# Altium PCB AX301_AX4010.PcbDoc (part 9 of 10)
Units mm, origin at the board's own origin, x right, y up, seen from the top; angles counter-clockwise.
Board outline 131.7 x 91.8 mm, 4 copper layers (Top Layer, GND, Mid-Layer 1, Bottom Layer); 191 components, 338 nets, 1108 pads, 420 vias.
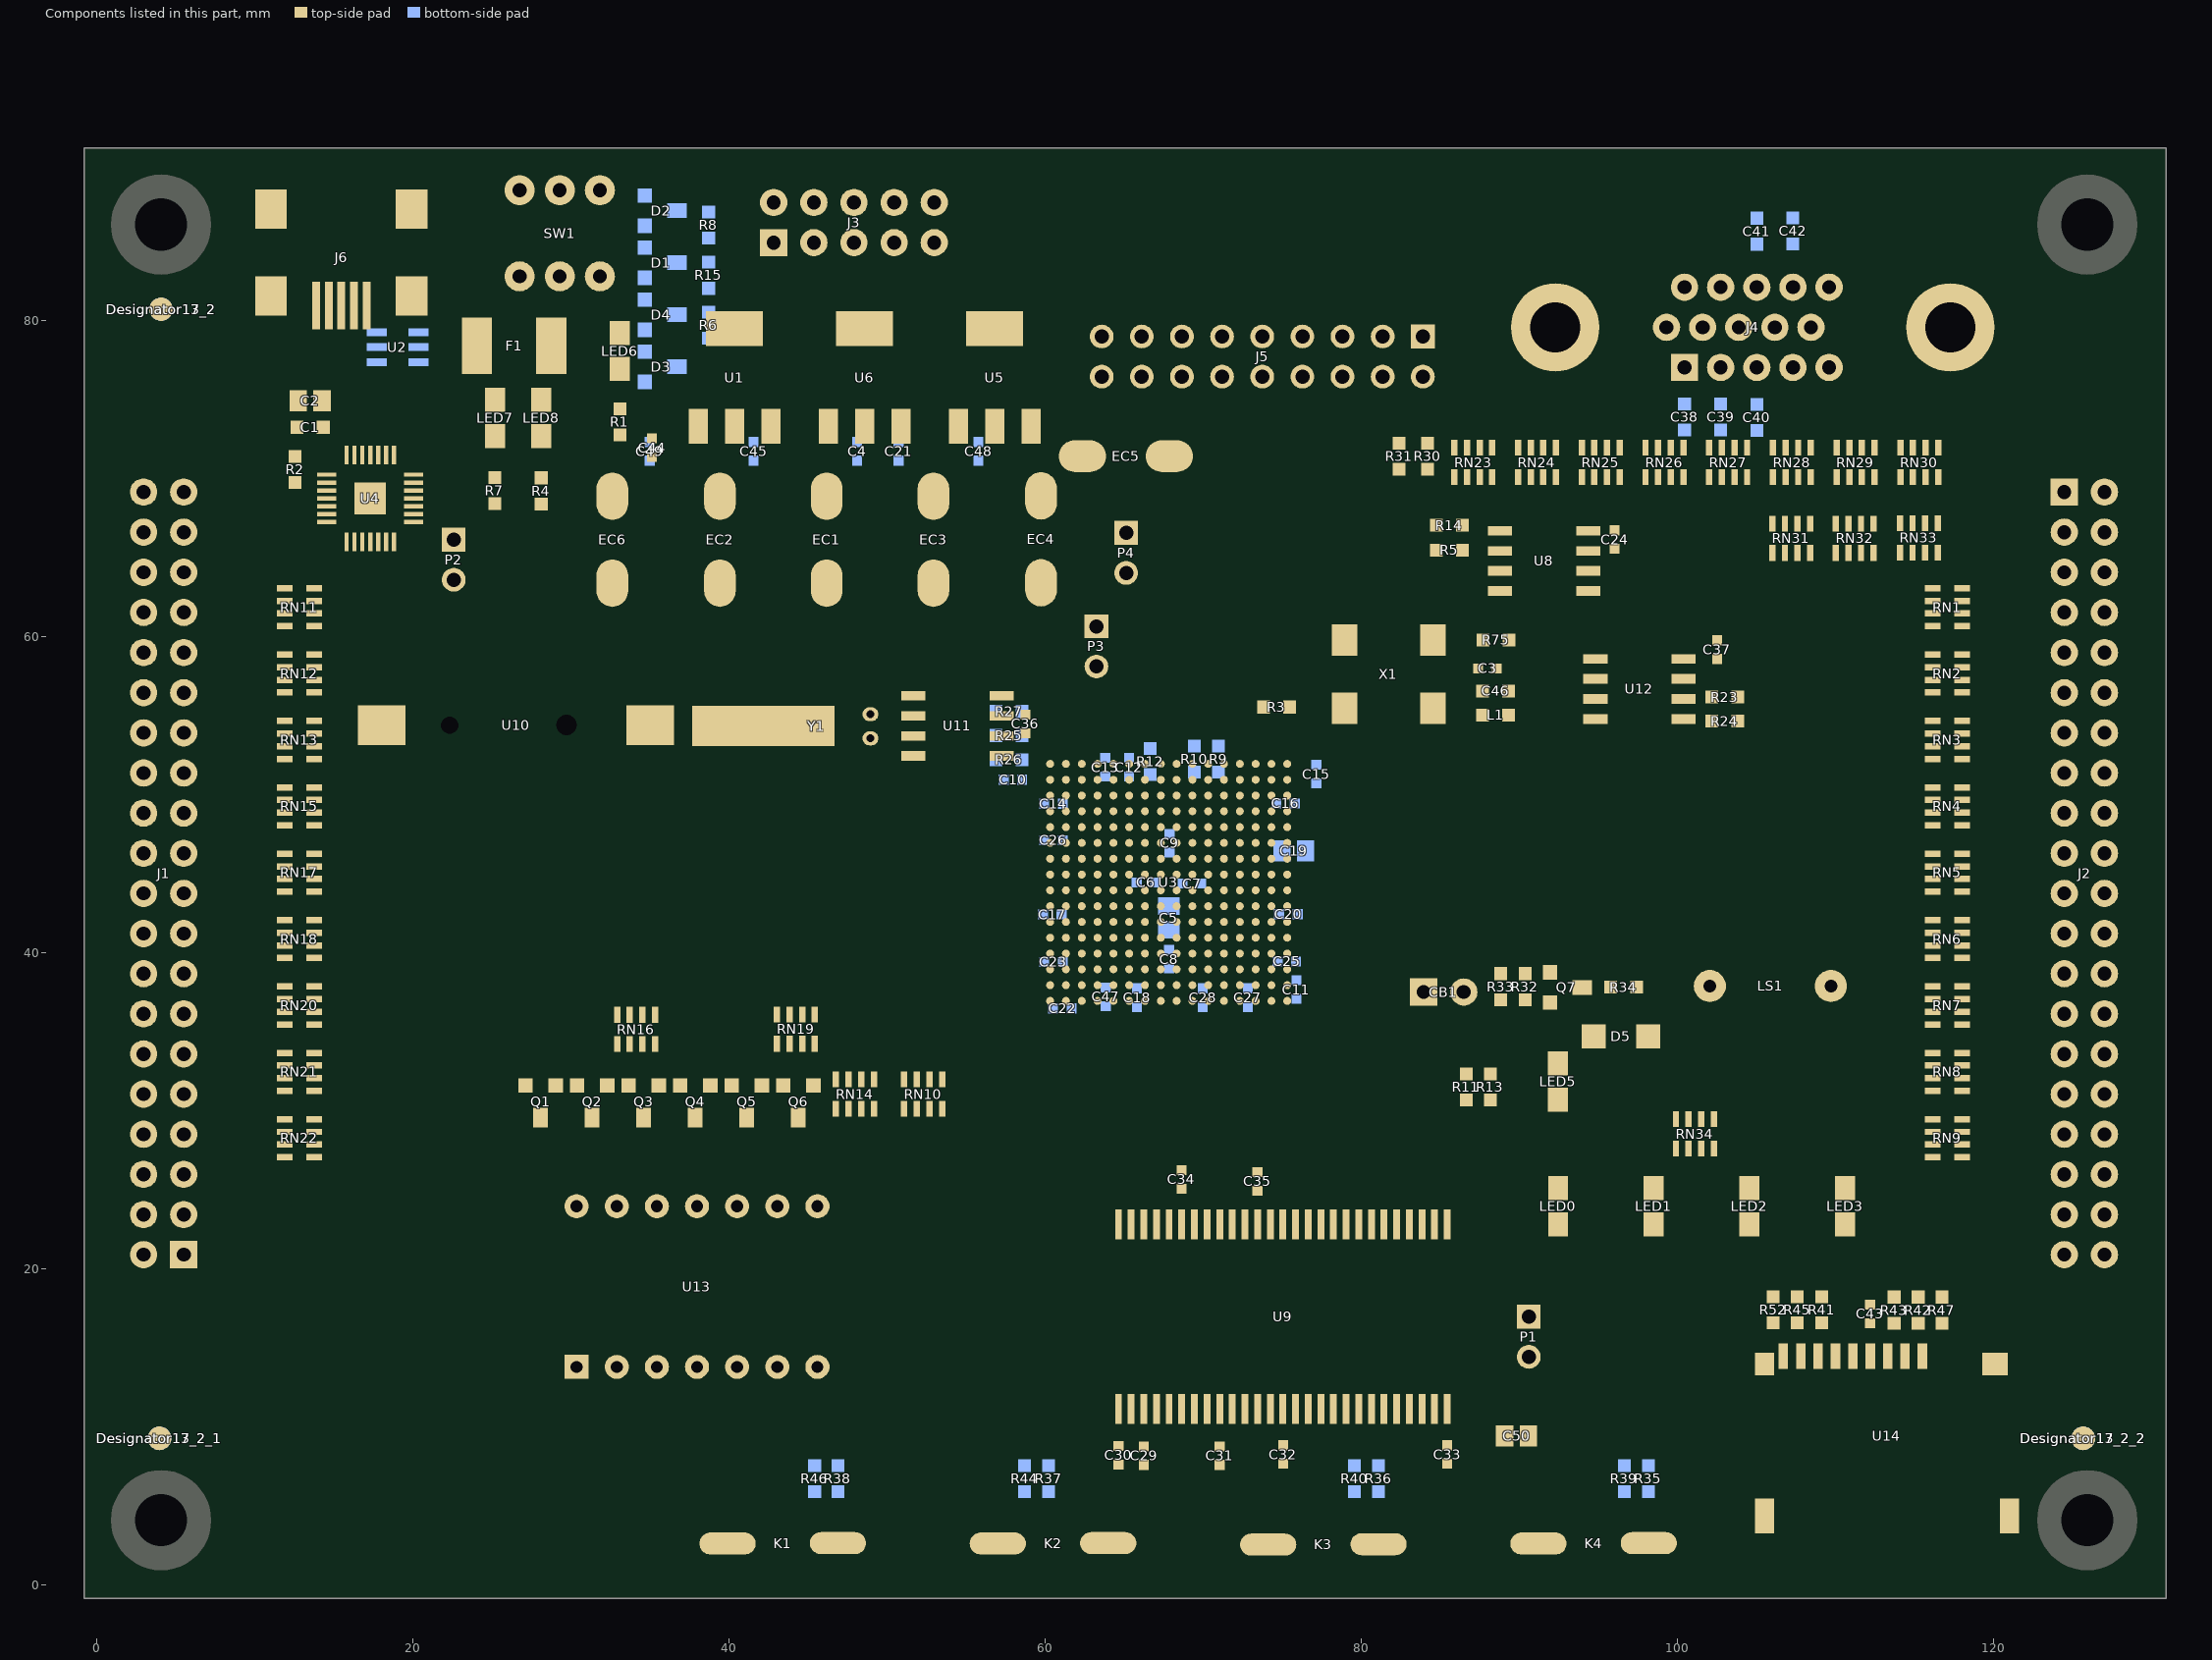
[diagram p11: the components of this part, seen from the top]

## Via types
v1: diameter 0.508, hole 0.254, Top Layer to Bottom Layer, 377 vias
v2: diameter 0.762, hole 0.381, Top Layer to Bottom Layer, 41 vias
v3: diameter 1.016, hole 0.508, Top Layer to Bottom Layer, 2 vias

## Nets (pads, with @x,y where several pads share a name; then routed paths per layer and width w, separated by ;. In a path a pad name is that pad's centre, name@x,y a point inside that pad or via, vN(x,y) a via of type N, cw(c..) or ccw(c..) an arc to the next point about the centre after c; other vN are vias at no path point) (continued)
copper on no net: (continued)
  Top Layer w0.017: 8.423,0.436 33.854,0.436 ; 8.423,0.452 33.854,0.452 ; 8.423,0.469 33.854,0.469 ; 8.423,0.485 33.854,0.485 ; 8.423,0.502 33.854,0.502 ; 8.423,0.518 33.854,0.518 ; 8.423,0.535 33.854,0.535 ; 8.423,0.551 33.854,0.551 ; 8.423,0.568 33.854,0.568 ; 8.423,0.584 33.854,0.584 ; 8.423,0.601 33.854,0.601 ; 8.423,0.617 33.854,0.617 ; 8.423,0.634 33.854,0.634 ; 8.423,0.65 33.854,0.65 ; 8.423,0.667 33.854,0.667 ; 8.423,0.683 33.854,0.683 ; 8.423,0.7 33.854,0.7 ; 8.423,0.716 33.854,0.716 ; 8.423,0.733 33.854,0.733 ; 8.423,0.749 33.854,0.749 ; 8.423,0.766 33.854,0.766 ; 8.423,0.782 33.854,0.782 ; 8.423,0.799 33.854,0.799 ; 8.423,0.815 33.854,0.815 ; 8.423,0.832 33.854,0.832 ; 8.423,0.848 33.854,0.848 ; 8.423,0.865 33.854,0.865 ; 8.423,0.881 33.854,0.881 ; 8.423,0.898 33.854,0.898 ; 8.423,0.914 33.854,0.914 ; 8.423,0.931 33.854,0.931 ; 8.423,0.947 33.854,0.947 ; 8.423,0.964 33.854,0.964 ; 8.423,0.98 33.854,0.98 ; 8.423,0.997 33.854,0.997 ; 8.423,1.013 33.854,1.013 ; 8.423,1.03 33.854,1.03 ; 8.423,1.046 33.854,1.046 ; 8.423,1.063 33.854,1.063 ; 8.423,1.079 33.854,1.079 ; 8.423,1.096 33.854,1.096 ; 8.423,1.113 33.854,1.113 ; 8.423,1.129 33.854,1.129 ; 8.423,1.146 33.854,1.146 ; 8.423,1.162 33.854,1.162 ; 8.423,1.179 33.854,1.179 ; 8.423,1.195 33.854,1.195 ; 8.423,1.212 33.854,1.212 ; 8.423,1.228 33.854,1.228 ; 8.423,1.245 33.854,1.245 ; 8.423,1.261 33.854,1.261 ; 8.423,1.278 33.854,1.278 ; 8.423,1.294 9.188,1.294 ; 8.423,1.311 9.188,1.311 ; 8.423,1.327 9.204,1.327 ; 8.423,1.344 9.204,1.344 ; 8.423,1.36 9.221,1.36 ; 8.423,1.377 9.221,1.377 ; 8.423,1.393 9.237,1.393 ; 8.423,1.41 9.237,1.41 ; 8.423,1.426 9.254,1.426 ; 8.423,1.443 9.254,1.443 ; 8.423,1.459 9.27,1.459 ; 8.423,1.476 9.27,1.476 ; 8.423,1.492 9.287,1.492 ; 8.423,1.509 9.303,1.509 ; 8.423,1.525 9.303,1.525 ; 8.423,1.542 9.32,1.542 ; 8.423,1.558 9.32,1.558 ; 8.423,1.575 9.336,1.575 ; 8.423,1.591 9.353,1.591 ; 8.423,1.608 9.353,1.608 ; 8.423,1.624 9.369,1.624 ; 8.423,1.641 9.369,1.641 ; 8.423,1.657 9.386,1.657 ; 8.423,1.674 9.402,1.674 ; 8.423,1.69 9.402,1.69 ; 8.423,1.707 9.419,1.707 ; 8.423,1.723 9.435,1.723 ; 8.423,1.74 9.435,1.74 ; 8.423,1.756 9.452,1.756 ; 8.423,1.773 9.468,1.773 ; 8.423,1.789 9.468,1.789 ; 8.423,1.806 9.485,1.806 ; 8.423,1.822 9.501,1.822 ; 8.423,1.839 9.518,1.839 ; 8.423,1.855 9.518,1.855 ; 8.423,1.872 9.534,1.872 ; 8.423,1.888 9.551,1.888 ; 8.423,1.905 9.567,1.905 ; 8.423,1.922 9.567,1.922 ; 8.423,1.938 9.584,1.938 ; 8.423,1.955 9.6,1.955 ; 8.423,1.971 9.617,1.971 ; 8.423,1.988 9.633,1.988 ; 8.423,2.004 9.633,2.004 ; 8.423,2.021 9.65,2.021 ; 8.423,2.037 9.666,2.037 ; 8.423,2.054 9.683,2.054 ; 8.423,2.07 9.699,2.07 ; 8.423,2.087 9.716,2.087 ; 8.423,2.103 9.732,2.103 ; 8.423,2.12 9.732,2.12 ; 8.423,2.136 9.749,2.136 ; 8.423,2.153 9.765,2.153 ; 8.423,2.169 9.782,2.169 ; 8.423,2.186 9.798,2.186 ; 8.423,2.202 9.815,2.202 ; 8.423,2.219 9.831,2.219 ; 8.423,2.235 9.848,2.235 ; 8.423,2.252 9.865,2.252 ; 8.423,2.268 9.881,2.268 ; 8.423,2.285 9.898,2.285 ; 8.423,2.301 9.914,2.301 ; 8.423,2.318 9.931,2.318 ; 8.423,2.334 9.947,2.334 ; 8.423,2.351 9.964,2.351 ; 8.423,2.367 9.98,2.367 ; 8.423,2.384 9.997,2.384 ; 8.423,2.4 10.013,2.4 ; 8.423,2.417 10.046,2.417 ; 8.423,2.433 10.063,2.433 ; 8.423,2.45 10.079,2.45 ; 8.423,2.466 10.096,2.466 ; 8.423,2.483 10.112,2.483 ; 8.423,2.499 10.145,2.499 ; 8.423,2.516 10.162,2.516 ; 8.423,2.532 10.178,2.532 ; 8.423,2.549 10.195,2.549 ; 8.423,2.565 10.211,2.565 ; 8.423,2.582 10.244,2.582 ; 8.423,2.598 10.261,2.598 ; 8.423,2.615 10.294,2.615 ; 8.423,2.631 10.31,2.631 ; 8.423,2.648 9.964,2.648 ; 8.423,2.664 9.98,2.664 ; 8.423,2.681 9.98,2.681 ; 8.423,2.697 9.997,2.697 ; 8.423,2.714 10.013,2.714 ; 8.423,2.73 10.013,2.73 ; 8.423,2.747 10.03,2.747 ; 8.423,2.764 10.03,2.764 ; 8.423,2.78 10.046,2.78 ; 8.423,2.797 10.046,2.797 ; 8.423,2.813 10.063,2.813 ; 8.423,2.83 10.063,2.83 ; 8.423,2.846 10.079,2.846 ; 8.423,2.863 10.096,2.863 ; 8.423,2.879 10.096,2.879 ; 8.423,2.896 10.112,2.896 ; 8.423,2.912 10.112,2.912 ; 8.423,2.929 10.129,2.929 ; 8.423,2.945 10.129,2.945 ; 8.423,2.962 10.145,2.962 ; 8.423,2.978 10.162,2.978 ; 8.423,2.995 10.162,2.995 ; 8.423,3.011 10.178,3.011 ; 8.423,3.028 10.178,3.028 ; 8.423,3.044 10.195,3.044 ; 8.423,3.061 10.195,3.061 ; 8.423,3.077 10.211,3.077 ; 8.423,3.094 10.228,3.094 ; 8.423,3.11 10.228,3.11 ; 8.423,3.127 10.244,3.127 ; 8.423,3.143 10.244,3.143 ; 8.423,3.16 10.261,3.16 ; 8.423,3.176 10.261,3.176 ; 8.423,3.193 10.277,3.193 ; 8.423,3.209 10.277,3.209 ; 8.423,3.226 10.294,3.226 ; 8.423,3.242 10.31,3.242 ; 8.423,3.259 10.31,3.259 ; 8.423,3.275 10.327,3.275 ; 8.423,3.292 10.327,3.292 ; 8.423,3.308 10.343,3.308 ; 8.423,3.325 10.343,3.325 ; 8.423,3.341 10.36,3.341 ; 8.423,3.358 10.376,3.358 ; 8.423,3.374 10.376,3.374 ; 8.423,3.391 10.393,3.391 ; 8.423,3.407 10.393,3.407 ; 8.423,3.424 10.409,3.424 ; 8.423,3.44 10.409,3.44 ; 8.423,3.457 10.426,3.457 ; 8.423,3.473 10.442,3.473 ; 8.423,3.49 10.442,3.49 ; 8.423,3.506 10.459,3.506 ; 8.423,3.523 10.459,3.523 ; 8.423,3.539 10.475,3.539 ; 8.423,3.556 10.475,3.556 ; 8.423,3.573 10.492,3.573 ; 8.423,3.589 10.508,3.589 ; 8.423,3.606 10.508,3.606 ; 8.423,3.622 10.525,3.622 ; 8.423,3.639 10.525,3.639 ; 8.423,3.655 10.541,3.655 ; 8.423,3.672 10.541,3.672 ; 8.423,3.688 10.558,3.688 ; 8.423,3.705 10.558,3.705 ; 8.423,3.721 10.574,3.721 ; 8.423,3.738 10.591,3.738 ; 8.423,3.754 10.591,3.754 ; 8.423,3.771 10.607,3.771 ; 8.423,3.787 10.607,3.787 ; 8.423,3.804 10.624,3.804 ; 8.423,3.82 10.624,3.82 ; 8.423,3.837 10.64,3.837 ; 8.423,3.853 10.657,3.853 ; 8.423,3.87 10.657,3.87 ; 8.423,3.886 10.674,3.886 ; 8.423,3.903 10.674,3.903 ; 8.423,3.919 10.69,3.919 ; 8.423,3.936 10.69,3.936 ; 8.423,3.952 10.707,3.952 ; 8.423,3.969 10.723,3.969 ; 8.423,3.985 10.723,3.985 ; 8.423,4.002 10.74,4.002 ; 8.423,4.018 10.74,4.018 ; 8.423,4.035 10.756,4.035 ; 8.423,4.051 10.756,4.051 ; 8.423,4.068 10.773,4.068 ; 8.423,4.084 10.773,4.084 ; 8.423,4.101 10.789,4.101 ; 8.423,4.117 10.806,4.117 ; 8.423,4.134 10.806,4.134 ; 8.423,4.15 10.822,4.15 ; 8.423,4.167 10.822,4.167 ; 8.423,4.183 10.839,4.183 ; 8.423,4.2 10.839,4.2 ; 8.423,4.216 10.855,4.216 ; 8.423,4.233 10.872,4.233 ; 8.423,4.249 10.872,4.249 ; 8.423,4.266 10.888,4.266 ; 8.423,4.282 10.888,4.282 ; 8.423,4.299 10.905,4.299 ; 8.423,4.315 10.905,4.315 ; 8.423,4.332 10.921,4.332 ; 8.423,4.348 10.938,4.348 ; 8.423,4.365 10.938,4.365 ; 8.423,4.381 10.954,4.381 ; 8.423,4.398 10.954,4.398 ; 8.423,4.415 10.971,4.415 ; 8.423,4.431 10.971,4.431 ; 8.423,4.448 10.987,4.448 ; 8.423,4.464 10.987,4.464 ; 8.423,4.481 11.004,4.481 ; 8.423,4.497 11.02,4.497 ; 8.423,4.514 11.02,4.514 ; 8.423,4.53 11.037,4.53 ; 8.423,4.547 11.037,4.547 ; 8.423,4.563 11.053,4.563 ; 8.423,4.58 11.053,4.58 ; 8.423,4.596 11.07,4.596 ; 8.423,4.613 11.086,4.613 ; 8.423,4.629 11.086,4.629 ; 8.423,4.646 11.103,4.646 ; 8.423,4.662 11.103,4.662 ; 8.423,4.679 11.119,4.679 ; 8.423,4.695 11.119,4.695 ; 8.423,4.712 11.136,4.712 ; 8.423,4.728 11.152,4.728 ; 8.423,4.745 11.152,4.745 ; 8.423,4.761 11.169,4.761 ; 8.423,4.778 11.169,4.778 ; 8.423,4.794 11.185,4.794 ; 8.423,4.811 11.185,4.811 ; 8.423,4.827 11.202,4.827 ; 8.423,4.844 11.218,4.844 ; 8.423,4.86 11.218,4.86 ; 8.423,4.877 11.235,4.877 ; 8.423,4.893 11.235,4.893 ; 8.423,4.91 11.251,4.91 ; 8.423,4.926 11.251,4.926 ; 8.423,4.943 11.268,4.943 ; 8.423,4.959 11.268,4.959 ; 8.423,4.976 11.284,4.976 ; 8.423,4.992 11.301,4.992 ; 8.423,5.009 11.301,5.009 ; 8.423,5.025 11.317,5.025 ; 8.423,5.042 11.317,5.042 ; 8.423,5.058 11.334,5.058 ; 8.423,5.075 11.334,5.075 ; 8.423,5.091 11.35,5.091 ; 8.423,5.108 11.367,5.108 ; 8.423,5.124 11.367,5.124 ; 8.423,5.141 11.383,5.141 ; 8.423,5.157 11.383,5.157 ; 8.423,5.174 11.4,5.174 ; 8.423,5.19 11.4,5.19 ; 8.423,5.207 11.416,5.207 ; 8.423,5.224 11.433,5.224 ; 8.423,5.24 11.433,5.24 ; 8.423,5.257 11.449,5.257 ; 8.423,5.273 11.449,5.273 ; 8.423,5.29 11.466,5.29 ; 8.423,5.306 11.466,5.306 ; 8.423,5.323 11.482,5.323 ; 8.423,5.339 11.482,5.339 ; 8.423,5.356 11.499,5.356 ; 8.423,5.372 11.516,5.372 ; 8.423,5.389 11.516,5.389 ; 8.423,5.405 11.532,5.405 ; 8.423,5.422 11.532,5.422 ; 8.423,5.438 11.549,5.438 ; 8.423,5.455 11.549,5.455 ; 8.423,5.471 11.565,5.471 ; 8.423,5.488 11.582,5.488 ; 8.423,5.504 11.582,5.504 ; 8.423,5.521 11.598,5.521 ; 8.423,5.537 11.598,5.537 ; 8.423,5.554 11.615,5.554 ; 8.423,5.57 11.615,5.57 ; 8.423,5.587 11.631,5.587 ; 8.423,5.603 11.648,5.603 ; 8.423,5.62 11.648,5.62 ; 8.423,5.636 11.664,5.636 ; 8.423,5.653 11.664,5.653 ; 8.423,5.669 11.681,5.669 ; 8.423,5.686 33.854,5.686 ; 8.423,5.702 33.854,5.702 ; 8.423,5.719 33.854,5.719 ; 8.423,5.735 33.854,5.735 ; 8.423,5.752 33.854,5.752 ; 8.423,5.768 33.854,5.768 ; 8.423,5.785 33.854,5.785 ; 8.423,5.801 33.854,5.801 ; 8.423,5.818 33.854,5.818 ; 8.423,5.834 33.854,5.834 ; 8.423,5.851 33.854,5.851 ; 8.423,5.867 33.854,5.867 ; 8.423,5.884 33.854,5.884 ; 8.423,5.9 33.854,5.9 ; 8.423,5.917 33.854,5.917 ; 8.423,5.933 33.854,5.933 ; 8.423,5.95 33.854,5.95 ; 8.423,5.966 33.854,5.966 ; 8.423,5.983 33.854,5.983 ; 8.423,5.999 33.854,5.999 ; 8.423,6.016 33.854,6.016 ; 8.423,6.032 33.854,6.032 ; 8.423,6.049 33.854,6.049 ; 8.423,6.066 33.854,6.066 ; 8.423,6.082 33.854,6.082 ; 8.423,6.099 33.854,6.099 ; 8.423,6.115 33.854,6.115 ; 8.423,6.132 33.854,6.132 ; 8.423,6.148 33.854,6.148 ; 8.423,6.165 33.854,6.165 ; 8.423,6.181 33.854,6.181 ; 8.423,6.198 33.854,6.198 ; 8.423,6.214 33.854,6.214 ; 8.423,6.231 33.854,6.231 ; 8.423,6.247 33.854,6.247 ; 8.423,6.264 33.854,6.264 ; 8.423,6.28 33.854,6.28 ; 8.423,6.297 33.854,6.297 ; 9.991,2.648 10.327,2.648 ; 10.024,2.664 10.36,2.664 ; 10.041,2.681 10.376,2.681 ; 10.057,2.697 10.393,2.697 ; 10.074,2.714 10.426,2.714 ; 10.09,2.73 10.459,2.73 ; 10.107,2.747 10.475,2.747 ; 10.14,2.764 10.508,2.764 ; 10.156,2.78 10.525,2.78 ; 10.173,2.797 10.558,2.797 ; 10.189,2.813 10.574,2.813 ; 10.206,2.83 10.607,2.83 ; 10.239,2.846 10.64,2.846 ; 10.255,2.863 10.674,2.863 ; 10.272,2.879 10.69,2.879 ; 10.305,2.896 10.723,2.896 ; 10.321,2.912 10.756,2.912 ; 10.338,2.929 10.789,2.929 ; 10.371,2.945 10.822,2.945 ; 10.387,2.962 10.855,2.962 ; 10.42,2.978 10.888,2.978 ; 10.437,2.995 10.921,2.995 ; 10.47,3.011 10.954,3.011 ; 10.486,3.028 10.987,3.028 ; 10.519,3.044 11.037,3.044 ; 10.552,3.061 11.07,3.061 ; 10.569,3.077 11.119,3.077 ; 10.602,3.094 11.152,3.094 ; 10.635,3.11 11.202,3.11 ; 10.651,3.127 11.251,3.127 ; 10.685,3.143 11.301,3.143 ; 10.701,1.294 12.49,1.294 ; 10.718,1.311 12.49,1.311 ; 10.718,1.327 12.49,1.327 ; 10.718,3.16 11.35,3.16 ; 10.734,1.344 12.49,1.344 ; 10.751,1.36 12.49,1.36 ; 10.751,1.377 12.49,1.377 ; 10.751,3.176 11.4,3.176 ; 10.767,1.393 12.49,1.393 ; 10.784,1.41 12.49,1.41 ; 10.784,1.426 12.49,1.426 ; 10.784,3.193 11.449,3.193 ; 10.8,1.443 12.49,1.443 ; 10.817,1.459 12.49,1.459 ; 10.817,1.476 12.473,1.476 ; 10.817,3.209 11.516,3.209 ; 10.833,1.492 12.473,1.492 ; 10.85,1.509 12.473,1.509 ; 10.85,1.525 12.473,1.525 ; 10.85,3.226 11.582,3.226 ; 10.866,1.542 12.473,1.542 ; 10.883,1.558 12.473,1.558 ; 10.883,3.242 11.648,3.242 ; 10.899,1.575 12.473,1.575 ; 10.899,1.591 12.473,1.591 ; 10.916,1.608 12.473,1.608 ; 10.916,3.259 11.73,3.259 ; 10.932,1.624 12.473,1.624 ; 10.949,1.641 12.473,1.641 ; 10.949,3.275 11.813,3.275 ; 10.965,1.657 12.457,1.657 ; 10.965,1.674 12.457,1.674 ; 10.982,1.69 12.457,1.69 ; 10.982,3.292 11.912,3.292 ; 10.998,1.707 12.457,1.707 ; 11.015,1.723 12.457,1.723 ; 11.015,3.308 12.044,3.308 ; 11.031,1.74 12.457,1.74 ; 11.048,1.756 12.457,1.756 ; 11.064,1.773 12.457,1.773 ; 11.064,3.325 12.325,3.325 ; 11.081,1.789 12.457,1.789 ; 11.097,1.806 12.457,1.806 ; 11.114,1.822 12.457,1.822 ; 11.114,3.341 12.325,3.341 ; 11.13,1.839 12.457,1.839 ; 11.147,1.855 12.44,1.855 ; 11.147,3.358 12.325,3.358 ; 11.163,1.872 12.44,1.872 ; 11.18,1.888 12.44,1.888 ; 11.196,1.905 12.44,1.905 ; 11.196,3.374 12.308,3.374 ; 11.213,1.922 12.44,1.922 ; 11.229,1.938 12.44,1.938 ; 11.246,1.955 12.44,1.955 ; 11.246,3.391 12.308,3.391 ; 11.262,1.971 12.44,1.971 ; 11.295,1.988 12.44,1.988 ; 11.295,3.407 12.308,3.407 ; 11.312,2.004 12.44,2.004 ; 11.328,2.021 12.44,2.021 ; 11.345,2.037 12.424,2.037 ; 11.345,3.424 12.308,3.424 ; 11.361,2.054 12.424,2.054 ; 11.394,2.07 12.424,2.07 ; 11.394,3.44 12.308,3.44 ; 11.411,2.087 12.424,2.087 ; 11.444,2.103 12.424,2.103 ; 11.46,2.12 12.424,2.12 ; 11.46,3.457 12.308,3.457 ; 11.477,2.136 12.424,2.136 ; 11.51,2.153 12.424,2.153 ; 11.51,3.473 12.308,3.473 ; 11.527,2.169 12.424,2.169 ; 11.56,2.186 12.424,2.186 ; 11.576,2.202 12.424,2.202 ; 11.593,3.49 12.308,3.49 ; 11.609,2.219 12.407,2.219 ; 11.642,2.235 12.407,2.235 ; 11.659,2.252 12.407,2.252 ; 11.659,3.506 12.308,3.506 ; 11.692,2.268 12.407,2.268 ; 11.725,2.285 12.407,2.285 ; 11.725,3.523 12.308,3.523 ; 11.741,2.301 12.407,2.301 ; 11.758,3.539 12.308,3.539 ; 11.774,2.318 12.407,2.318 ; 11.774,3.556 12.291,3.556 ; 11.774,3.573 12.291,3.573 ; 11.791,3.589 12.291,3.589 ; 11.791,3.606 12.291,3.606 ; 11.807,2.334 12.407,2.334 ; 11.807,3.622 12.291,3.622 ; 11.807,3.639 12.291,3.639 ; 11.824,3.655 12.291,3.655 ; 11.824,3.672 12.291,3.672 ; 11.824,3.688 12.291,3.688 ; 11.84,2.351 12.407,2.351 ; 11.84,3.705 12.291,3.705 ; 11.84,3.721 12.291,3.721 ; 11.857,3.738 12.291,3.738 ; 11.857,3.754 12.275,3.754 ; 11.873,2.367 12.407,2.367 ; 11.873,3.771 12.275,3.771 ; 11.873,3.787 12.275,3.787 ; 11.89,3.804 12.275,3.804 ; 11.89,3.82 12.275,3.82 ; 11.906,2.384 12.407,2.384 ; 11.906,3.837 12.275,3.837 ; 11.906,3.853 12.275,3.853 ; 11.923,3.87 12.275,3.87 ; 11.923,3.886 12.275,3.886 ; 11.939,2.4 12.407,2.4 ; 11.939,3.903 12.275,3.903 ; 11.939,3.919 12.275,3.919 ; 11.956,3.936 12.275,3.936 ; 11.956,3.952 12.258,3.952 ; 11.956,3.969 12.258,3.969 ; 11.972,2.417 12.391,2.417 ; 11.972,3.985 12.258,3.985 ; 11.972,4.002 12.258,4.002 ; 11.989,4.018 12.258,4.018 ; 11.989,4.035 12.258,4.035 ; 12.005,4.051 12.258,4.051 ; 12.005,4.068 12.258,4.068 ; 12.022,2.433 12.391,2.433 ; 12.022,4.084 12.258,4.084 ; 12.022,4.101 12.258,4.101 ; 12.038,4.117 12.258,4.117 ; 12.038,4.134 12.258,4.134 ; 12.055,4.15 12.242,4.15 ; 12.055,4.167 12.242,4.167 ; 12.071,2.45 12.391,2.45 ; 12.071,4.183 12.242,4.183 ; 12.071,4.2 12.242,4.2 ; 12.088,4.216 12.242,4.216 ; 12.088,4.233 12.242,4.233 ; 12.104,2.466 12.391,2.466 ; 12.104,4.249 12.242,4.249 ; 12.104,4.266 12.242,4.266 ; 12.104,4.282 12.242,4.282 ; 12.121,4.299 12.242,4.299 ; 12.121,4.315 12.242,4.315 ; 12.137,4.332 12.242,4.332 ; 12.137,4.348 12.225,4.348 ; 12.154,2.483 12.391,2.483 ; 12.154,4.365 12.225,4.365 ; 12.154,4.381 12.225,4.381 ; 12.17,4.398 12.225,4.398 ; 12.17,4.415 12.225,4.415 ; 12.187,3.209 12.325,3.209 ; 12.187,3.226 12.325,3.226 ; 12.187,3.242 12.325,3.242 ; 12.187,3.259 12.325,3.259 ; 12.187,3.275 12.325,3.275 ; 12.187,3.292 12.325,3.292 ; 12.187,3.308 12.325,3.308 ; 12.187,4.431 12.225,4.431 ; 12.187,4.448 12.225,4.448 ; 12.203,2.499 12.391,2.499 ; 12.203,2.995 12.341,2.995 ; 12.203,3.011 12.341,3.011 ; 12.203,3.028 12.341,3.028 ; 12.203,3.044 12.341,3.044 ; 12.203,3.061 12.341,3.061 ; 12.203,3.077 12.341,3.077 ; 12.203,3.094 12.341,3.094 ; 12.203,3.11 12.341,3.11 ; 12.203,3.127 12.341,3.127 ; 12.203,3.143 12.341,3.143 ; 12.203,3.16 12.341,3.16 ; 12.203,3.176 12.325,3.176 ; 12.203,3.193 12.325,3.193 ; 12.203,4.464 12.225,4.464 ; 12.203,4.481 12.225,4.481 ; 12.22,2.78 12.374,2.78 ; 12.22,2.797 12.358,2.797 ; 12.22,2.813 12.358,2.813 ; 12.22,2.83 12.358,2.83 ; 12.22,2.846 12.358,2.846 ; 12.22,2.863 12.358,2.863 ; 12.22,2.879 12.358,2.879 ; 12.22,2.896 12.358,2.896 ; 12.22,2.912 12.358,2.912 ; 12.22,2.929 12.358,2.929 ; 12.22,2.945 12.358,2.945 ; 12.22,2.962 12.358,2.962 ; 12.22,2.978 12.341,2.978 ; 12.22,4.497 12.225,4.497 ; 12.22,4.514 12.225,4.514 ; 12.236,2.549 12.391,2.549 ; 12.236,2.565 12.391,2.565 ; 12.236,2.582 12.391,2.582 ; 12.236,2.598 12.374,2.598 ; 12.236,2.615 12.374,2.615 ; 12.236,2.631 12.374,2.631 ; 12.236,2.648 12.374,2.648 ; 12.236,2.664 12.374,2.664 ; 12.236,2.681 12.374,2.681 ; 12.236,2.697 12.374,2.697 ; 12.236,2.714 12.374,2.714 ; 12.236,2.73 12.374,2.73 ; 12.236,2.747 12.374,2.747 ; 12.236,2.764 12.374,2.764 ; 12.253,2.516 12.391,2.516 ; 12.253,2.532 12.391,2.532 ; 13.161,5.62 15.66,5.62 ; 13.161,5.636 15.66,5.636 ; 13.161,5.653 15.66,5.653 ; 13.161,5.669 15.676,5.669 ; 13.178,5.521 15.643,5.521 ; 13.178,5.537 15.643,5.537 ; 13.178,5.554 15.643,5.554 ; 13.178,5.57 15.643,5.57 ; 13.178,5.587 15.66,5.587 ; 13.178,5.603 15.66,5.603 ; 13.194,5.405 15.61,5.405 ; 13.194,5.422 15.61,5.422 ; 13.194,5.438 15.627,5.438 ; 13.194,5.455 15.627,5.455 ; 13.194,5.471 15.627,5.471 ; 13.194,5.488 15.627,5.488 ; 13.194,5.504 15.627,5.504 ; 13.211,5.306 15.593,5.306 ; 13.211,5.323 15.593,5.323 ; 13.211,5.339 15.593,5.339 ; 13.211,5.356 15.61,5.356 ; 13.211,5.372 15.61,5.372 ; 13.211,5.389 15.61,5.389 ; 13.227,5.207 15.577,5.207 ; 13.227,5.224 15.577,5.224 ; 13.227,5.24 15.577,5.24 ; 13.227,5.257 15.577,5.257 ; 13.227,5.273 15.577,5.273 ; 13.227,5.29 15.593,5.29 ; 13.244,5.108 15.544,5.108 ; 13.244,5.124 15.56,5.124 ; 13.244,5.141 15.56,5.141 ; 13.244,5.157 15.56,5.157 ; 13.244,5.174 15.56,5.174 ; 13.244,5.19 15.56,5.19 ; 13.26,4.992 15.527,4.992 ; 13.26,5.009 15.527,5.009 ; 13.26,5.025 15.527,5.025 ; 13.26,5.042 15.527,5.042 ; 13.26,5.058 15.544,5.058 ; 13.26,5.075 15.544,5.075 ; 13.26,5.091 15.544,5.091 ; 13.277,4.893 15.511,4.893 ; 13.277,4.91 15.511,4.91 ; 13.277,4.926 15.511,4.926 ; 13.277,4.943 15.511,4.943 ; 13.277,4.959 15.511,4.959 ; 13.277,4.976 15.527,4.976 ; 13.293,4.794 15.478,4.794 ; 13.293,4.811 15.494,4.811 ; 13.293,4.827 15.494,4.827 ; 13.293,4.844 15.494,4.844 ; 13.293,4.86 15.494,4.86 ; 13.293,4.877 15.494,4.877 ; 13.31,4.679 15.461,4.679 ; 13.31,4.695 15.461,4.695 ; 13.31,4.712 15.461,4.712 ; 13.31,4.728 15.461,4.728 ; 13.31,4.745 15.478,4.745 ; 13.31,4.761 15.478,4.761 ; 13.31,4.778 15.478,4.778 ; 13.326,4.58 15.445,4.58 ; 13.326,4.596 15.445,4.596 ; 13.326,4.613 15.445,4.613 ; 13.326,4.629 15.445,4.629 ; 13.326,4.646 15.445,4.646 ; 13.326,4.662 15.461,4.662 ; 13.343,4.481 15.412,4.481 ; 13.343,4.497 15.412,4.497 ; 13.343,4.514 15.428,4.514 ; 13.343,4.53 15.428,4.53 ; 13.343,4.547 15.428,4.547 ; 13.343,4.563 15.428,4.563 ; 13.359,4.381 15.395,4.381 ; 13.359,4.398 15.395,4.398 ; 13.359,4.415 15.395,4.415 ; 13.359,4.431 15.412,4.431 ; 13.359,4.448 15.412,4.448 ; 13.359,4.464 15.412,4.464 ; 13.376,4.266 15.379,4.266 ; 13.376,4.282 15.379,4.282 ; 13.376,4.299 15.379,4.299 ; 13.376,4.315 15.379,4.315 ; 13.376,4.332 15.379,4.332 ; 13.376,4.348 15.395,4.348 ; 13.376,4.365 15.395,4.365 ; 13.392,4.167 15.346,4.167 ; 13.392,4.183 15.346,4.183 ; 13.392,4.2 15.362,4.2 ; 13.392,4.216 15.362,4.216 ; 13.392,4.233 15.362,4.233 ; 13.392,4.249 15.362,4.249 ; 13.409,4.068 15.329,4.068 ; 13.409,4.084 15.329,4.084 ; 13.409,4.101 15.329,4.101 ; 13.409,4.117 15.346,4.117 ; 13.409,4.134 15.346,4.134 ; 13.409,4.15 15.346,4.15 ; 13.425,3.969 15.313,3.969 ; 13.425,3.985 15.313,3.985 ; 13.425,4.002 15.313,4.002 ; 13.425,4.018 15.313,4.018 ; 13.425,4.035 15.329,4.035 ; 13.425,4.051 15.329,4.051 ; 13.442,3.853 15.28,3.853 ; 13.442,3.87 15.28,3.87 ; 13.442,3.886 15.296,3.886 ; 13.442,3.903 15.296,3.903 ; 13.442,3.919 15.296,3.919 ; 13.442,3.936 15.296,3.936 ; 13.442,3.952 15.296,3.952 ; 13.458,3.754 15.263,3.754 ; 13.458,3.771 15.263,3.771 ; 13.458,3.787 15.263,3.787 ; 13.458,3.804 15.28,3.804 ; 13.458,3.82 15.28,3.82 ; 13.458,3.837 15.28,3.837 ; 13.475,3.655 15.247,3.655 ; 13.475,3.672 15.247,3.672 ; 13.475,3.688 15.247,3.688 ; 13.475,3.705 15.247,3.705 ; 13.475,3.721 15.247,3.721 ; 13.475,3.738 15.263,3.738 ; 13.491,3.539 15.214,3.539 ; 13.491,3.556 15.214,3.556 ; 13.491,3.573 15.23,3.573 ; 13.491,3.589 15.23,3.589 ; 13.491,3.606 15.23,3.606 ; 13.491,3.622 15.23,3.622 ; 13.491,3.639 15.23,3.639 ; 13.508,3.44 15.197,3.44 ; 13.508,3.457 15.197,3.457 ; 13.508,3.473 15.197,3.473 ; 13.508,3.49 15.214,3.49 ; 13.508,3.506 15.214,3.506 ; 13.508,3.523 15.214,3.523 ; 13.524,3.341 15.181,3.341 ; 13.524,3.358 15.181,3.358 ; 13.524,3.374 15.181,3.374 ; 13.524,3.391 15.181,3.391 ; 13.524,3.407 15.181,3.407 ; 13.524,3.424 15.197,3.424 ; 13.541,3.242 15.148,3.242 ; 13.541,3.259 15.164,3.259 ; 13.541,3.275 15.164,3.275 ; 13.541,3.292 15.164,3.292 ; 13.541,3.308 15.164,3.308 ; 13.541,3.325 15.164,3.325 ; 13.557,3.127 15.131,3.127 ; 13.557,3.143 15.131,3.143 ; 13.557,3.16 15.131,3.16 ; 13.557,3.176 15.131,3.176 ; 13.557,3.193 15.148,3.193 ; 13.557,3.209 15.148,3.209 ; 13.557,3.226 15.148,3.226 ; 13.574,3.028 15.115,3.028 ; 13.574,3.044 15.115,3.044 ; 13.574,3.061 15.115,3.061 ; 13.574,3.077 15.115,3.077 ; 13.574,3.094 15.115,3.094 ; 13.574,3.11 15.131,3.11 ; 13.59,2.929 15.082,2.929 ; 13.59,2.945 15.098,2.945 ; 13.59,2.962 15.098,2.962 ; 13.59,2.978 15.098,2.978 ; 13.59,2.995 15.098,2.995 ; 13.59,3.011 15.098,3.011 ; 13.607,2.813 15.065,2.813 ; 13.607,2.83 15.065,2.83 ; 13.607,2.846 15.065,2.846 ; 13.607,2.863 15.065,2.863 ; 13.607,2.879 15.082,2.879 ; 13.607,2.896 15.082,2.896 ; 13.607,2.912 15.082,2.912 ; 13.623,2.714 15.049,2.714 ; 13.623,2.73 15.049,2.73 ; 13.623,2.747 15.049,2.747 ; 13.623,2.764 15.049,2.764 ; 13.623,2.78 15.049,2.78 ; 13.623,2.797 15.065,2.797 ; 13.64,2.615 15.016,2.615 ; 13.64,2.631 15.016,2.631 ; 13.64,2.648 15.032,2.648 ; 13.64,2.664 15.032,2.664 ; 13.64,2.681 15.032,2.681 ; 13.64,2.697 15.032,2.697 ; 13.656,2.516 14.999,2.516 ; 13.656,2.532 14.999,2.532 ; 13.656,2.549 14.999,2.549 ; 13.656,2.565 15.016,2.565 ; 13.656,2.582 15.016,2.582 ; 13.656,2.598 15.016,2.598 ; 13.673,2.4 14.983,2.4 ; 13.673,2.417 14.983,2.417 ; 13.673,2.433 14.983,2.433 ; 13.673,2.45 14.983,2.45 ; 13.673,2.466 14.983,2.466 ; 13.673,2.483 14.999,2.483 ; 13.673,2.499 14.999,2.499 ; 13.689,2.301 14.95,2.301 ; 13.689,2.318 14.95,2.318 ; 13.689,2.334 14.966,2.334 ; 13.689,2.351 14.966,2.351 ; 13.689,2.367 14.966,2.367 ; 13.689,2.384 14.966,2.384 ; 13.706,2.202 14.933,2.202 ; 13.706,2.219 14.933,2.219 ; 13.706,2.235 14.933,2.235 ; 13.706,2.252 14.95,2.252 ; 13.706,2.268 14.95,2.268 ; 13.706,2.285 14.95,2.285 ; 13.722,2.103 14.917,2.103 ; 13.722,2.12 14.917,2.12 ; 13.722,2.136 14.917,2.136 ; 13.722,2.153 14.917,2.153 ; 13.722,2.169 14.933,2.169 ; 13.722,2.186 14.933,2.186 ; 13.739,1.988 14.884,1.988 ; 13.739,2.004 14.884,2.004 ; 13.739,2.021 14.9,2.021 ; 13.739,2.037 14.9,2.037 ; 13.739,2.054 14.9,2.054 ; 13.739,2.07 14.9,2.07 ; 13.739,2.087 14.9,2.087 ; 13.755,1.888 14.867,1.888 ; 13.755,1.905 14.867,1.905 ; 13.755,1.922 14.867,1.922 ; 13.755,1.938 14.884,1.938 ; 13.755,1.955 14.884,1.955 ; 13.755,1.971 14.884,1.971 ; 13.772,1.789 14.851,1.789 ; 13.772,1.806 14.851,1.806 ; 13.772,1.822 14.851,1.822 ; 13.772,1.839 14.851,1.839 ; 13.772,1.855 14.851,1.855 ; 13.772,1.872 14.867,1.872 ; 13.788,1.674 14.818,1.674 ; 13.788,1.69 14.818,1.69 ; 13.788,1.707 14.834,1.707 ; 13.788,1.723 14.834,1.723 ; 13.788,1.74 14.834,1.74 ; 13.788,1.756 14.834,1.756 ; 13.788,1.773 14.834,1.773 ; 13.805,1.575 14.801,1.575 ; 13.805,1.591 14.801,1.591 ; 13.805,1.608 14.801,1.608 ; 13.805,1.624 14.818,1.624 ; 13.805,1.641 14.818,1.641 ; 13.805,1.657 14.818,1.657 ; 13.821,1.476 14.784,1.476 ; 13.821,1.492 14.784,1.492 ; 13.821,1.509 14.784,1.509 ; 13.821,1.525 14.784,1.525 ; 13.821,1.542 14.784,1.542 ; 13.821,1.558 14.801,1.558 ; 13.838,1.377 14.751,1.377 ; 13.838,1.393 14.768,1.393 ; 13.838,1.41 14.768,1.41 ; 13.838,1.426 14.768,1.426 ; 13.838,1.443 14.768,1.443 ; 13.838,1.459 14.768,1.459 ; 13.854,1.294 14.735,1.294 ; 13.854,1.311 14.735,1.311 ; 13.854,1.327 14.751,1.327 ; 13.854,1.344 14.751,1.344 ; 13.854,1.36 14.751,1.36 ; 16.364,2.367 19.539,2.367 ; 16.364,2.384 19.539,2.384 ; 16.364,2.4 19.539,2.4 ; 16.364,2.417 19.556,2.417 ; 16.364,2.433 19.556,2.433 ; 16.38,2.45 19.556,2.45 ; 16.38,2.466 19.556,2.466 ; 16.38,2.483 19.556,2.483 ; 16.38,2.499 19.572,2.499 ; 16.397,2.516 19.572,2.516 ; 16.397,2.532 19.572,2.532 ; 16.397,2.549 19.572,2.549 ; 16.397,2.565 19.572,2.565 ; 16.397,2.582 19.589,2.582 ; 16.413,2.598 19.589,2.598 ; 16.413,2.615 19.589,2.615 ; 16.413,2.631 19.589,2.631 ; 16.413,2.648 19.605,2.648 ; 16.413,2.664 19.605,2.664 ; 16.43,2.681 19.605,2.681 ; 16.43,2.697 19.605,2.697 ; 16.43,2.714 19.605,2.714 ; 16.43,2.73 19.622,2.73 ; 16.447,2.747 19.622,2.747 ; 16.447,2.764 19.622,2.764 ; 16.447,2.78 19.622,2.78 ; 16.447,2.797 19.622,2.797 ; 16.447,2.813 19.638,2.813 ; 16.463,2.83 19.638,2.83 ; 16.463,2.846 19.638,2.846 ; 16.463,2.863 19.638,2.863 ; 16.463,2.879 19.655,2.879 ; 16.463,2.896 19.655,2.896 ; 16.48,2.912 19.655,2.912 ; 16.48,2.929 19.655,2.929 ; 16.48,2.945 19.655,2.945 ; 16.48,2.962 19.671,2.962 ; 16.496,2.978 19.671,2.978 ; 16.496,2.995 19.671,2.995 ; 16.496,3.011 19.671,3.011 ; 16.496,3.028 19.688,3.028 ; 16.496,3.044 19.688,3.044 ; 16.513,3.061 19.688,3.061 ; 16.513,3.077 19.688,3.077 ; 16.513,3.094 19.688,3.094 ; 16.513,3.11 19.704,3.11 ; 16.529,3.127 19.704,3.127 ; 16.529,3.143 19.704,3.143 ; 16.529,3.16 19.704,3.16 ; 16.529,3.176 19.704,3.176 ; 16.529,3.193 19.721,3.193 ; 16.546,3.209 19.721,3.209 ; 16.546,3.226 19.721,3.226 ; 16.546,3.242 19.721,3.242 ; 16.546,3.259 19.737,3.259 ; 16.546,3.275 19.737,3.275 ; 16.562,3.292 19.737,3.292 ; 16.562,3.308 19.737,3.308 ; 16.562,3.325 19.737,3.325 ; 16.562,3.341 19.754,3.341 ; 16.579,3.358 19.754,3.358 ; 16.579,3.374 19.754,3.374 ; 16.579,3.391 19.754,3.391 ; 16.579,3.407 19.754,3.407 ; 16.579,3.424 19.771,3.424 ; 16.595,3.44 19.771,3.44 ; 16.595,3.457 19.771,3.457 ; 16.595,3.473 19.771,3.473 ; 16.595,3.49 19.787,3.49 ; 16.595,3.506 19.787,3.506 ; 16.612,3.523 19.787,3.523 ; 16.612,3.539 19.787,3.539 ; 16.612,3.556 19.787,3.556 ; 16.612,3.573 19.804,3.573 ; 16.628,3.589 19.804,3.589 ; 16.628,3.606 19.804,3.606 ; 16.628,3.622 19.804,3.622 ; 16.628,3.639 19.804,3.639 ; 16.628,3.655 19.82,3.655 ; 16.645,3.672 19.82,3.672 ; 16.645,3.688 19.82,3.688 ; 16.645,3.705 19.82,3.705 ; 16.645,3.721 19.837,3.721 ; 16.645,3.738 19.837,3.738 ; 16.661,3.754 19.837,3.754 ; 16.661,3.771 19.837,3.771 ; 16.661,3.787 19.837,3.787 ; 16.661,3.804 19.853,3.804 ; 16.678,3.82 19.853,3.82 ; 16.678,3.837 19.853,3.837 ; 16.678,3.853 19.853,3.853 ; 16.678,3.87 19.853,3.87 ; 16.678,3.886 19.87,3.886 ; 16.694,3.903 19.87,3.903 ; 16.694,3.919 19.87,3.919 ; 16.694,3.936 19.87,3.936 ; 16.694,3.952 19.886,3.952 ; 16.694,3.969 19.886,3.969 ; 16.711,3.985 19.886,3.985 ; 16.711,4.002 19.886,4.002 ; 16.711,4.018 19.886,4.018 ; 16.711,4.035 19.903,4.035 ; 16.727,4.051 19.903,4.051 ; 16.727,4.068 19.903,4.068 ; 16.727,4.084 19.903,4.084 ; 16.727,4.101 19.903,4.101 ; 16.727,4.117 19.919,4.117 ; 16.744,4.134 19.919,4.134 ; 16.744,4.15 19.919,4.15 ; 16.744,4.167 19.919,4.167 ; 16.744,4.183 19.936,4.183 ; 16.744,4.2 19.936,4.2 ; 16.76,4.216 19.936,4.216 ; 16.76,4.233 19.936,4.233 ; 16.76,4.249 19.936,4.249 ; 16.76,4.266 19.952,4.266 ; 16.777,4.282 19.952,4.282 ; 16.777,4.299 19.952,4.299 ; 16.777,4.315 19.952,4.315 ; 16.777,4.332 19.952,4.332 ; 16.777,4.348 19.969,4.348 ; 16.793,4.365 19.969,4.365 ; 16.793,4.381 19.969,4.381 ; 16.793,4.398 19.969,4.398 ; 16.793,4.415 19.985,4.415 ; 16.81,4.431 19.985,4.431 ; 16.81,4.448 19.985,4.448 ; 16.81,4.464 19.985,4.464 ; 16.81,4.481 19.985,4.481 ; 16.81,4.497 20.002,4.497 ; 16.826,4.514 20.002,4.514 ; 16.826,4.53 20.002,4.53 ; 16.826,4.547 20.002,4.547 ; 16.826,4.563 20.002,4.563 ; 16.826,4.58 20.018,4.58 ; 16.843,4.596 20.018,4.596 ; 16.843,4.613 20.018,4.613 ; 16.843,4.629 20.018,4.629 ; 16.843,4.646 20.035,4.646 ; 16.859,4.662 20.035,4.662 ; 16.859,4.679 20.035,4.679 ; 16.859,4.695 20.035,4.695 ; 16.859,4.712 20.035,4.712 ; 16.859,4.728 20.051,4.728 ; 16.876,4.745 20.051,4.745 ; 16.876,4.761 20.051,4.761 ; 16.876,4.778 20.051,4.778 ; 16.876,4.794 20.051,4.794 ; 16.876,4.811 20.068,4.811 ; 16.892,4.827 20.068,4.827 ; 16.892,4.844 20.068,4.844 ; 16.892,4.86 20.068,4.86 ; 16.892,4.877 20.084,4.877 ; 16.909,4.893 20.084,4.893 ; 16.909,4.91 20.084,4.91 ; 16.909,4.926 20.084,4.926 ; 16.909,4.943 20.084,4.943 ; 16.909,4.959 20.101,4.959 ; 16.925,4.976 20.101,4.976 ; 16.925,4.992 20.101,4.992 ; 16.925,5.009 20.101,5.009 ; 16.925,5.025 20.101,5.025 ; 16.925,5.042 20.117,5.042 ; 16.942,5.058 20.117,5.058 ; 16.942,5.075 20.117,5.075 ; 16.942,5.091 20.117,5.091 ; 16.942,5.108 20.134,5.108 ; 16.958,5.124 20.134,5.124 ; 16.958,5.141 20.134,5.141 ; 16.958,5.157 20.134,5.157 ; 16.958,5.174 20.134,5.174 ; 16.958,5.19 20.15,5.19 ; 16.975,5.207 20.15,5.207 ; 16.975,5.224 20.15,5.224 ; 16.975,5.24 20.15,5.24 ; 16.975,5.257 20.15,5.257 ; 16.975,5.273 20.167,5.273 ; 16.991,5.29 20.167,5.29 ; 16.991,5.306 20.167,5.306 ; 16.991,5.323 20.167,5.323 ; 16.991,5.339 20.183,5.339 ; 17.008,5.356 20.183,5.356 ; 17.008,5.372 20.183,5.372 ; 17.008,5.389 20.183,5.389 ; 17.008,5.405 20.183,5.405 ; 17.008,5.422 20.2,5.422 ; 17.024,5.438 20.2,5.438 ; 17.024,5.455 20.2,5.455 ; 17.024,5.471 20.2,5.471 ; 17.024,5.488 20.2,5.488 ; 17.024,5.504 20.216,5.504 ; 17.041,5.521 20.216,5.521 ; 17.041,5.537 20.216,5.537 ; 17.041,5.554 20.216,5.554 ; 17.041,5.57 20.233,5.57 ; 17.057,5.587 20.233,5.587 ; 17.057,5.603 20.233,5.603 ; 17.057,5.62 20.233,5.62 ; 17.057,5.636 20.233,5.636 ; 17.057,5.653 20.249,5.653 ; 17.074,5.669 20.249,5.669 ; 18.312,1.294 19.308,1.294 ; 18.312,1.311 19.308,1.311 ; 18.329,1.327 19.308,1.327 ; 18.329,1.344 19.325,1.344 ; 18.329,1.36 19.325,1.36 ; 18.329,1.377 19.325,1.377 ; 18.329,1.393 19.325,1.393 ; 18.345,1.41 19.325,1.41 ; 18.345,1.426 19.341,1.426 ; 18.345,1.443 19.341,1.443 ; 18.345,1.459 19.341,1.459 ; 18.345,1.476 19.341,1.476 ; 18.362,1.492 19.358,1.492 ; 18.362,1.509 19.358,1.509 ; 18.362,1.525 19.358,1.525 ; 18.362,1.542 19.358,1.542 ; 18.362,1.558 19.358,1.558 ; 18.378,1.575 19.374,1.575 ; 18.378,1.591 19.374,1.591 ; 18.378,1.608 19.374,1.608 ; 18.378,1.624 19.374,1.624 ; 18.395,1.641 19.374,1.641 ; 18.395,1.657 19.391,1.657 ; 18.395,1.674 19.391,1.674 ; 18.395,1.69 19.391,1.69 ; 18.395,1.707 19.391,1.707 ; 18.411,1.723 19.407,1.723 ; 18.411,1.74 19.407,1.74 ; 18.411,1.756 19.407,1.756 ; 18.411,1.773 19.407,1.773 ; 18.411,1.789 19.407,1.789 ; 18.428,1.806 19.424,1.806 ; 18.428,1.822 19.424,1.822 ; 18.428,1.839 19.424,1.839 ; 18.428,1.855 19.424,1.855 ; 18.428,1.872 19.424,1.872 ; 18.444,1.888 19.44,1.888 ; 18.444,1.905 19.44,1.905 ; 18.444,1.922 19.44,1.922 ; 18.444,1.938 19.44,1.938 ; 18.444,1.955 19.457,1.955 ; 18.461,1.971 19.457,1.971 ; 18.461,1.988 19.457,1.988 ; 18.461,2.004 19.457,2.004 ; 18.461,2.021 19.457,2.021 ; 18.477,2.037 19.473,2.037 ; 18.477,2.054 19.473,2.054 ; 18.477,2.07 19.473,2.07 ; 18.477,2.087 19.473,2.087 ; 18.477,2.103 19.473,2.103 ; 18.494,2.12 19.49,2.12 ; 18.494,2.136 19.49,2.136 ; 18.494,2.153 19.49,2.153 ; 18.494,2.169 19.49,2.169 ; 18.494,2.186 19.506,2.186 ; 18.51,2.202 19.506,2.202 ; 18.51,2.219 19.506,2.219 ; 18.51,2.235 19.506,2.235 ; 18.51,2.252 19.506,2.252 ; 18.51,2.268 19.523,2.268 ; 18.527,2.285 19.523,2.285 ; 18.527,2.301 19.523,2.301 ; 18.527,2.318 19.523,2.318 ; 18.527,2.334 19.523,2.334 ; 18.543,2.351 19.539,2.351 ; 20.706,1.294 22.049,1.294 ; 20.723,1.311 22.049,1.311 ; 20.723,1.327 22.049,1.327 ; 20.723,1.344 22.049,1.344 ; 20.723,1.36 22.049,1.36 ; 20.723,1.377 22.065,1.377 ; 20.739,1.393 22.065,1.393 ; 20.739,1.41 22.065,1.41 ; 20.739,1.426 22.065,1.426 ; 20.739,1.443 22.082,1.443 ; 20.739,1.459 22.082,1.459 ; 20.756,1.476 22.082,1.476 ; 20.756,1.492 22.082,1.492 ; 20.756,1.509 22.082,1.509 ; 20.756,1.525 22.098,1.525 ; 20.772,1.542 22.098,1.542 ; 20.772,1.558 22.098,1.558 ; 20.772,1.575 22.098,1.575 ; 20.772,1.591 22.098,1.591 ; 20.772,1.608 22.115,1.608 ; 20.789,1.624 22.115,1.624 ; 20.789,1.641 22.115,1.641 ; 20.789,1.657 22.115,1.657 ; 20.789,1.674 22.131,1.674 ; 20.789,1.69 22.131,1.69 ; 20.805,1.707 22.131,1.707 ; 20.805,1.723 22.131,1.723 ; 20.805,1.74 22.131,1.74 ; 20.805,1.756 22.148,1.756 ; 20.822,1.773 22.148,1.773 ; 20.822,1.789 22.148,1.789 ; 20.822,1.806 22.148,1.806 ; 20.822,1.822 22.148,1.822 ; 20.822,1.839 22.164,1.839 ; 20.838,1.855 22.164,1.855 ; 20.838,1.872 22.164,1.872 ; 20.838,1.888 22.164,1.888 ; 20.838,1.905 22.181,1.905 ; 20.855,1.922 22.181,1.922 ; 20.855,1.938 22.181,1.938 ; 20.855,1.955 22.181,1.955 ; 20.855,1.971 22.181,1.971 ; 20.855,1.988 22.197,1.988 ; 20.871,2.004 22.197,2.004 ; 20.871,2.021 22.197,2.021 ; 20.871,2.037 22.197,2.037 ; 20.871,2.054 22.197,2.054 ; 20.871,2.07 22.214,2.07 ; 20.888,2.087 22.214,2.087 ; 20.888,2.103 22.214,2.103 ; 20.888,2.12 22.214,2.12 ; 20.888,2.136 22.231,2.136 ; 20.904,2.153 22.231,2.153 ; 20.904,2.169 22.231,2.169 ; 20.904,2.186 22.231,2.186 ; 20.904,2.202 22.231,2.202 ; 20.904,2.219 22.247,2.219 ; 20.921,2.235 22.247,2.235 ; 20.921,2.252 22.247,2.252 ; 20.921,2.268 22.247,2.268 ; 20.921,2.285 22.247,2.285 ; 20.921,2.301 22.264,2.301 ; 20.937,2.318 22.264,2.318 ; 20.937,2.334 22.264,2.334 ; 20.937,2.351 22.264,2.351 ; 20.937,2.367 22.28,2.367 ; 20.954,2.384 22.28,2.384 ; 20.954,2.4 22.28,2.4 ; 20.954,2.417 22.28,2.417 ; 20.954,2.433 22.28,2.433 ; 20.954,2.45 22.297,2.45 ; 20.97,2.466 22.297,2.466 ; 20.97,2.483 22.297,2.483 ; 20.97,2.499 22.297,2.499 ; 20.97,2.516 22.313,2.516 ; 20.97,2.532 22.313,2.532 ; 20.987,2.549 22.313,2.549 ; 20.987,2.565 22.313,2.565 ; 20.987,2.582 22.313,2.582 ; 20.987,2.598 22.33,2.598 ; 21.003,2.615 22.33,2.615 ; 21.003,2.631 22.33,2.631 ; 21.003,2.648 22.33,2.648 ; 21.003,2.664 22.33,2.664 ; 21.003,2.681 22.346,2.681 ; 21.02,2.697 22.346,2.697 ; 21.02,2.714 22.346,2.714 ; 21.02,2.73 22.346,2.73 ; 21.02,2.747 22.363,2.747 ; 21.02,2.764 22.363,2.764 ; 21.036,2.78 22.363,2.78 ; 21.036,2.797 22.363,2.797 ; 21.036,2.813 22.363,2.813 ; 21.036,2.83 22.379,2.83 ; 21.053,2.846 22.379,2.846 ; 21.053,2.863 22.379,2.863 ; 21.053,2.879 22.379,2.879 ; 21.053,2.896 22.379,2.896 ; 21.053,2.912 22.396,2.912 ; 21.069,2.929 22.396,2.929 ; 21.069,2.945 22.396,2.945 ; 21.069,2.962 22.396,2.962 ; 21.069,2.978 22.412,2.978 ; 21.069,2.995 22.412,2.995 ; 21.086,3.011 22.412,3.011 ; 21.086,3.028 22.412,3.028 ; 21.086,3.044 22.412,3.044 ; 21.086,3.061 22.429,3.061 ; 21.102,3.077 22.429,3.077 ; 21.102,3.094 22.429,3.094 ; 21.102,3.11 22.429,3.11 ; 21.102,3.127 22.429,3.127 ; 21.102,3.143 22.445,3.143 ; 21.119,3.16 22.445,3.16 ; 21.119,3.176 22.445,3.176 ; 21.119,3.193 22.445,3.193 ; 21.119,3.209 22.462,3.209 ; 21.119,3.226 22.462,3.226 ; 21.135,3.242 22.462,3.242 ; 21.135,3.259 22.462,3.259 ; 21.135,3.275 22.462,3.275 ; 21.135,3.292 22.478,3.292 ; 21.152,3.308 22.478,3.308 ; 21.152,3.325 22.478,3.325 ; 21.152,3.341 22.478,3.341 ; 21.152,3.358 22.478,3.358 ; 21.152,3.374 22.495,3.374 ; 21.168,3.391 22.495,3.391 ; 21.168,3.407 22.495,3.407 ; 21.168,3.424 22.495,3.424 ; 21.168,3.44 22.511,3.44 ; 21.168,3.457 22.511,3.457 ; 21.185,3.473 22.511,3.473 ; 21.185,3.49 22.511,3.49 ; 21.185,3.506 22.511,3.506 ; 21.185,3.523 22.528,3.523 ; 21.201,3.539 22.528,3.539 ; 21.201,3.556 22.528,3.556 ; 21.201,3.573 22.528,3.573 ; 21.201,3.589 22.528,3.589 ; 21.201,3.606 22.544,3.606 ; 21.218,3.622 22.544,3.622 ; 21.218,3.639 22.544,3.639 ; 21.218,3.655 22.544,3.655 ; 21.218,3.672 22.561,3.672 ; 21.218,3.688 22.561,3.688 ; 21.234,3.705 22.561,3.705 ; 21.234,3.721 22.561,3.721 ; 21.234,3.738 22.561,3.738 ; 21.234,3.754 22.577,3.754 ; 21.251,3.771 22.577,3.771 ; 21.251,3.787 22.577,3.787 ; 21.251,3.804 22.577,3.804 ; 21.251,3.82 22.594,3.82 ; 21.251,3.837 22.594,3.837 ; 21.267,3.853 22.594,3.853 ; 21.267,3.87 22.594,3.87 ; 21.267,3.886 22.594,3.886 ; 21.267,3.903 22.61,3.903 ; 21.267,3.919 22.61,3.919 ; 21.284,3.936 22.61,3.936 ; 21.284,3.952 22.61,3.952 ; 21.284,3.969 22.61,3.969 ; 21.284,3.985 22.627,3.985 ; 21.3,4.002 22.627,4.002 ; 21.3,4.018 22.627,4.018 ; 21.3,4.035 22.627,4.035 ; 21.3,4.051 22.643,4.051 ; 21.3,4.068 22.643,4.068 ; 21.317,4.084 22.643,4.084 ; 21.317,4.101 22.643,4.101 ; 21.317,4.117 22.643,4.117 ; 21.317,4.134 22.66,4.134 ; 21.317,4.15 22.66,4.15 ; 21.333,4.167 22.66,4.167 ; 21.333,4.183 22.66,4.183 ; 21.333,4.2 22.66,4.2 ; 21.333,4.216 22.676,4.216 ; 21.35,4.233 22.676,4.233 ; 21.35,4.249 22.676,4.249 ; 21.35,4.266 22.676,4.266 ; 21.35,4.282 22.693,4.282 ; 21.35,4.299 22.693,4.299 ; 21.366,4.315 22.693,4.315 ; 21.366,4.332 22.693,4.332 ; 21.366,4.348 22.693,4.348 ; 21.366,4.365 22.709,4.365 ; 21.366,4.381 22.709,4.381 ; 21.383,4.398 22.709,4.398 ; 21.383,4.415 22.709,4.415 ; 21.383,4.431 22.709,4.431 ; 21.383,4.448 22.726,4.448 ; 21.399,4.464 22.726,4.464 ; 21.399,4.481 22.726,4.481 ; 21.399,4.497 22.726,4.497 ; 21.399,4.514 22.742,4.514 ; 21.399,4.53 22.742,4.53 ; 21.416,4.547 22.742,4.547 ; 21.416,4.563 22.742,4.563 ; 21.416,4.58 22.742,4.58 ; 21.416,4.596 22.759,4.596 ; 21.416,4.613 22.759,4.613 ; 21.433,4.629 22.759,4.629 ; 21.433,4.646 22.759,4.646 ; 21.433,4.662 22.759,4.662 ; 21.433,4.679 22.775,4.679 ; 21.449,4.695 22.775,4.695 ; 21.449,4.712 22.775,4.712 ; 21.449,4.728 22.775,4.728 ; 21.449,4.745 22.792,4.745 ; 21.449,4.761 22.792,4.761 ; 21.466,4.778 22.792,4.778 ; 21.466,4.794 22.792,4.794 ; 21.466,4.811 22.792,4.811 ; 21.466,4.827 22.808,4.827 ; 21.466,4.844 22.808,4.844 ; 21.482,4.86 22.808,4.86 ; 21.482,4.877 22.808,4.877 ; 21.482,4.893 22.825,4.893 ; 21.482,4.91 22.825,4.91 ; 21.499,4.926 22.825,4.926 ; 21.499,4.943 22.825,4.943 ; 21.499,4.959 22.825,4.959 ; 21.499,4.976 22.841,4.976 ; 21.499,4.992 22.841,4.992 ; 21.515,5.009 22.841,5.009 ; 21.515,5.025 22.841,5.025 ; 21.515,5.042 22.841,5.042 ; 21.515,5.058 22.858,5.058 ; 21.515,5.075 22.858,5.075 ; 21.532,5.091 22.858,5.091 ; 21.532,5.108 22.858,5.108 ; 21.532,5.124 22.874,5.124 ; 21.532,5.141 22.874,5.141 ; 21.548,5.157 22.874,5.157 ; 21.548,5.174 22.874,5.174 ; 21.548,5.19 22.874,5.19 ; 21.548,5.207 22.891,5.207 ; 21.548,5.224 22.891,5.224 ; 21.565,5.24 22.891,5.24 ; 21.565,5.257 22.891,5.257 ; 21.565,5.273 22.891,5.273 ; 21.565,5.29 22.907,5.29 ; 21.565,5.306 22.907,5.306 ; 21.581,5.323 22.907,5.323 ; 21.581,5.339 22.907,5.339 ; 21.581,5.356 22.924,5.356 ; 21.581,5.372 22.924,5.372 ; 21.598,5.389 22.924,5.389 ; 21.598,5.405 22.924,5.405 ; 21.598,5.422 22.924,5.422 ; 21.598,5.438 22.94,5.438 ; 21.598,5.455 22.94,5.455 ; 21.614,5.471 22.94,5.471 ; 21.614,5.488 22.94,5.488 ; 21.614,5.504 22.94,5.504 ; 21.614,5.521 22.957,5.521 ; 21.614,5.537 22.957,5.537 ; 21.631,5.554 22.957,5.554 ; 21.631,5.57 22.957,5.57 ; 21.631,5.587 22.973,5.587 ; 21.631,5.603 22.973,5.603 ; 21.647,5.62 22.973,5.62 ; 21.647,5.636 22.973,5.636 ; 21.647,5.653 22.973,5.653 ; 21.647,5.669 22.99,5.669 ; 23.348,1.294 24.955,1.294 ; 23.348,1.311 24.955,1.311 ; 23.348,1.327 24.955,1.327 ; 23.364,1.344 24.938,1.344 ; 23.364,1.36 24.938,1.36 ; 23.364,1.377 24.922,1.377 ; 23.364,1.393 24.922,1.393 ; 23.364,1.41 24.905,1.41 ; 23.381,1.426 24.905,1.426 ; 23.381,1.443 24.905,1.443 ; 23.381,1.459 24.889,1.459 ; 23.381,1.476 24.889,1.476 ; 23.397,1.492 24.872,1.492 ; 23.397,1.509 24.872,1.509 ; 23.397,1.525 24.872,1.525 ; 23.397,1.542 24.856,1.542 ; 23.397,1.558 24.856,1.558 ; 23.414,1.575 24.839,1.575 ; 23.414,1.591 24.839,1.591 ; 23.414,1.608 24.823,1.608 ; 23.414,1.624 24.823,1.624 ; 23.414,1.641 24.823,1.641 ; 23.43,1.657 24.806,1.657 ; 23.43,1.674 24.806,1.674 ; 23.43,1.69 24.79,1.69 ; 23.43,1.707 24.79,1.707 ; 23.447,1.723 24.773,1.723 ; 23.447,1.74 24.773,1.74 ; 23.447,1.756 24.773,1.756 ; 23.447,1.773 24.757,1.773 ; 23.447,1.789 24.757,1.789 ; 23.463,1.806 24.74,1.806 ; 23.463,1.822 24.74,1.822 ; 23.463,1.839 24.724,1.839 ; 23.463,1.855 24.724,1.855 ; 23.463,1.872 24.724,1.872 ; 23.48,1.888 24.707,1.888 ; 23.48,1.905 24.707,1.905 ; 23.48,1.922 24.69,1.922 ; 23.48,1.938 24.69,1.938 ; 23.496,1.955 24.674,1.955 ; 23.496,1.971 24.674,1.971 ; 23.496,1.988 24.674,1.988 ; 23.496,2.004 24.657,2.004 ; 23.496,2.021 24.657,2.021 ; 23.513,2.037 24.641,2.037 ; 23.513,2.054 24.641,2.054 ; 23.513,2.07 24.624,2.07 ; 23.513,2.087 24.624,2.087 ; 23.513,2.103 24.624,2.103 ; 23.529,2.12 24.608,2.12 ; 23.529,2.136 24.608,2.136 ; 23.529,2.153 24.591,2.153 ; 23.529,2.169 24.591,2.169 ; 23.546,2.186 24.575,2.186 ; 23.546,2.202 24.575,2.202 ; 23.546,2.219 24.575,2.219 ; 23.546,2.235 24.558,2.235 ; 23.546,2.252 24.558,2.252 ; 23.562,2.268 24.542,2.268 ; 23.562,2.285 24.542,2.285 ; 23.562,2.301 24.525,2.301 ; 23.562,2.318 24.525,2.318 ; 23.562,2.334 24.525,2.334 ; 23.579,2.351 24.509,2.351 ; 23.579,2.367 24.509,2.367 ; 23.579,2.384 24.492,2.384 ; 23.579,2.4 24.492,2.4 ; 23.595,2.417 24.476,2.417 ; 23.595,2.433 24.476,2.433 ; 23.595,2.45 24.476,2.45 ; 23.595,2.466 24.459,2.466 ; 23.595,2.483 24.459,2.483 ; 23.612,2.499 24.443,2.499 ; 23.612,2.516 24.443,2.516 ; 23.612,2.532 24.426,2.532 ; 23.612,2.549 24.426,2.549 ; 23.612,2.565 24.426,2.565 ; 23.628,2.582 24.41,2.582 ; 23.628,2.598 24.41,2.598 ; 23.628,2.615 24.393,2.615 ; 23.628,2.631 24.393,2.631 ; 23.645,2.648 24.377,2.648 ; 23.645,2.664 24.377,2.664 ; 23.645,2.681 24.377,2.681 ; 23.645,2.697 24.36,2.697 ; 23.645,2.714 24.36,2.714 ; 23.661,2.73 24.344,2.73 ; 23.661,2.747 24.344,2.747 ; 23.661,2.764 24.327,2.764 ; 23.661,2.78 24.327,2.78 ; 23.661,2.797 24.327,2.797 ; 23.678,2.813 24.311,2.813 ; 23.678,2.83 24.311,2.83 ; 23.678,2.846 24.294,2.846 ; 23.678,2.863 24.294,2.863 ; 23.694,2.879 24.278,2.879 ; 23.694,2.896 24.278,2.896 ; 23.694,2.912 24.278,2.912 ; 23.694,2.929 24.261,2.929 ; 23.694,2.945 24.261,2.945 ; 23.711,2.962 24.245,2.962 ; 23.711,2.978 24.245,2.978 ; 23.711,2.995 24.245,2.995 ; 23.711,3.011 24.228,3.011 ; 23.711,3.028 24.228,3.028 ; 23.727,3.044 24.212,3.044 ; 23.727,3.061 24.212,3.061 ; 23.727,3.077 24.195,3.077 ; 23.727,3.094 24.195,3.094 ; 23.744,3.11 24.195,3.11 ; 23.744,3.127 24.179,3.127 ; 23.744,3.143 24.179,3.143 ; 23.744,3.16 24.162,3.16 ; 23.744,3.176 24.162,3.176 ; 23.76,3.193 24.146,3.193 ; 23.76,3.209 24.146,3.209 ; 23.76,3.226 24.146,3.226 ; 23.76,3.242 24.129,3.242 ; 23.76,3.259 24.129,3.259 ; 23.777,3.275 24.113,3.275 ; 23.777,3.292 24.113,3.292 ; 23.777,3.308 24.096,3.308 ; 23.777,3.325 24.096,3.325 ; 23.793,3.341 24.096,3.341 ; 23.793,3.358 24.08,3.358 ; 23.793,3.374 24.08,3.374 ; 23.793,3.391 24.063,3.391 ; 23.793,3.407 24.063,3.407 ; 23.81,3.424 24.047,3.424 ; 23.81,3.44 24.047,3.44 ; 23.81,3.457 24.047,3.457 ; 23.81,3.473 24.03,3.473 ; 23.81,3.49 24.03,3.49 ; 23.826,3.506 24.014,3.506 ; 23.826,3.523 24.014,3.523 ; 23.826,3.539 23.997,3.539 ; 23.826,3.556 23.997,3.556 ; 23.843,3.573 23.997,3.573 ; 23.843,3.589 23.981,3.589 ; 23.843,3.606 23.981,3.606 ; 23.843,3.622 23.964,3.622 ; 23.843,3.639 23.964,3.639 ; 23.859,3.655 23.948,3.655 ; 23.859,3.672 23.948,3.672 ; 23.859,3.688 23.948,3.688 ; 23.859,3.705 23.931,3.705 ; 23.859,3.721 23.931,3.721 ; 23.876,3.738 23.915,3.738 ; 23.876,3.754 23.915,3.754 ; 23.876,3.771 23.898,3.771 ; 23.876,3.787 23.898,3.787 ; 23.893,3.804 23.898,3.804 ; 24.289,5.653 25.896,5.653 ; 24.289,5.669 25.896,5.669 ; 24.305,5.62 25.896,5.62 ; 24.305,5.636 25.896,5.636 ; 24.322,5.587 25.879,5.587 ; 24.322,5.603 25.896,5.603 ; 24.338,5.537 25.879,5.537 ; 24.338,5.554 25.879,5.554 ; 24.338,5.57 25.879,5.57 ; 24.355,5.504 25.863,5.504 ; 24.355,5.521 25.879,5.521 ; 24.371,5.455 25.863,5.455 ; 24.371,5.471 25.863,5.471 ; 24.371,5.488 25.863,5.488 ; 24.388,5.422 25.846,5.422 ; 24.388,5.438 25.846,5.438 ; 24.404,5.389 25.846,5.389 ; 24.404,5.405 25.846,5.405 ; 24.421,5.339 25.83,5.339 ; 24.421,5.356 25.83,5.356 ; 24.421,5.372 25.846,5.372 ; 24.437,5.306 25.83,5.306 ; 24.437,5.323 25.83,5.323 ; 24.454,5.273 25.813,5.273 ; 24.454,5.29 25.83,5.29 ; 24.47,5.224 25.813,5.224 ; 24.47,5.24 25.813,5.24 ; 24.47,5.257 25.813,5.257 ; 24.487,5.19 25.797,5.19 ; 24.487,5.207 25.797,5.207 ; 24.503,5.157 25.797,5.157 ; 24.503,5.174 25.797,5.174 ; 24.52,5.108 25.78,5.108 ; 24.52,5.124 25.78,5.124 ; 24.52,5.141 25.797,5.141 ; 24.536,5.075 25.78,5.075 ; 24.536,5.091 25.78,5.091 ; 24.553,5.042 25.764,5.042 ; 24.553,5.058 25.764,5.058 ; 24.569,4.992 25.764,4.992 ; 24.569,5.009 25.764,5.009 ; 24.569,5.025 25.764,5.025 ; 24.586,4.959 25.747,4.959 ; 24.586,4.976 25.747,4.976 ; 24.602,4.91 25.747,4.91 ; 24.602,4.926 25.747,4.926 ; 24.602,4.943 25.747,4.943 ; 24.619,4.877 25.731,4.877 ; 24.619,4.893 25.731,4.893 ; 24.635,4.844 25.731,4.844 ; 24.635,4.86 25.731,4.86 ; 24.652,4.794 25.714,4.794 ; 24.652,4.811 25.714,4.811 ; 24.652,4.827 25.714,4.827 ; 24.668,4.761 25.714,4.761 ; 24.668,4.778 25.714,4.778 ; 24.685,4.728 25.698,4.728 ; 24.685,4.745 25.698,4.745 ; 24.701,4.679 25.698,4.679 ; 24.701,4.695 25.698,4.695 ; 24.701,4.712 25.698,4.712 ; 24.718,4.646 25.681,4.646 ; 24.718,4.662 25.681,4.662 ; 24.735,4.613 25.681,4.613 ; 24.735,4.629 25.681,4.629 ; 24.751,4.563 25.665,4.563 ; 24.751,4.58 25.665,4.58 ; 24.751,4.596 25.665,4.596 ; 24.768,4.53 25.665,4.53 ; 24.768,4.547 25.665,4.547 ; 24.784,4.481 25.648,4.481 ; 24.784,4.497 25.648,4.497 ; 24.784,4.514 25.648,4.514 ; 24.801,4.448 25.648,4.448 ; 24.801,4.464 25.648,4.464 ; 24.817,4.415 25.632,4.415 ; 24.817,4.431 25.632,4.431 ; 24.834,4.365 25.615,4.365 ; 24.834,4.381 25.632,4.381 ; 24.834,4.398 25.632,4.398 ; 24.85,4.332 25.615,4.332 ; 24.85,4.348 25.615,4.348 ; 24.867,4.299 25.615,4.299 ; 24.867,4.315 25.615,4.315 ; 24.883,4.249 25.599,4.249 ; 24.883,4.266 25.599,4.266 ; 24.883,4.282 25.599,4.282 ; 24.9,4.216 25.582,4.216 ; 24.9,4.233 25.599,4.233 ; 24.916,4.183 25.582,4.183 ; 24.916,4.2 25.582,4.2 ; 24.933,4.134 25.566,4.134 ; 24.933,4.15 25.582,4.15 ; 24.933,4.167 25.582,4.167 ; 24.949,4.101 25.566,4.101 ; 24.949,4.117 25.566,4.117 ; 24.966,4.051 25.549,4.051 ; 24.966,4.068 25.566,4.068 ; 24.966,4.084 25.566,4.084 ; 24.982,4.018 25.549,4.018 ; 24.982,4.035 25.549,4.035 ; 24.999,3.985 25.533,3.985 ; 24.999,4.002 25.549,4.002 ; 25.015,3.936 25.533,3.936 ; 25.015,3.952 25.533,3.952 ; 25.015,3.969 25.533,3.969 ; 25.032,3.903 25.516,3.903 ; 25.032,3.919 25.533,3.919 ; 25.048,3.87 25.516,3.87 ; 25.048,3.886 25.516,3.886 ; 25.065,3.82 25.499,3.82 ; 25.065,3.837 25.516,3.837 ; 25.065,3.853 25.516,3.853 ; 25.081,3.787 25.499,3.787 ; 25.081,3.804 25.499,3.804 ; 25.098,3.754 25.483,3.754 ; 25.098,3.771 25.499,3.771 ; 25.114,3.705 25.483,3.705 ; 25.114,3.721 25.483,3.721 ; 25.114,3.738 25.483,3.738 ; 25.131,3.672 25.466,3.672 ; 25.131,3.688 25.483,3.688 ; 25.147,3.639 25.466,3.639 ; 25.147,3.655 25.466,3.655 ; 25.164,3.589 25.45,3.589 ; 25.164,3.606 25.466,3.606 ; 25.164,3.622 25.466,3.622 ; 25.18,3.556 25.45,3.556 ; 25.18,3.573 25.45,3.573 ; 25.197,3.506 25.433,3.506 ; 25.197,3.523 25.433,3.523 ; 25.197,3.539 25.45,3.539 ; 25.213,3.473 25.433,3.473 ; 25.213,3.49 25.433,3.49 ; 25.23,3.44 25.417,3.44 ; 25.23,3.457 25.433,3.457 ; 25.246,3.391 25.417,3.391 ; 25.246,3.407 25.417,3.407 ; 25.246,3.424 25.417,3.424 ; 25.263,3.358 25.4,3.358 ; 25.263,3.374 25.4,3.374 ; 25.279,3.325 25.4,3.325 ; 25.279,3.341 25.4,3.341 ; 25.296,3.275 25.384,3.275 ; 25.296,3.292 25.384,3.292 ; 25.296,3.308 25.4,3.308 ; 25.312,3.242 25.384,3.242 ; 25.312,3.259 25.384,3.259 ; 25.329,3.209 25.367,3.209 ; 25.329,3.226 25.384,3.226 ; 25.345,3.16 25.367,3.16 ; 25.345,3.176 25.367,3.176 ; 25.345,3.193 25.367,3.193 ; 26.27,1.294 27.15,1.294 ; 26.27,1.311 27.167,1.311 ; 26.27,1.327 27.184,1.327 ; 26.27,1.344 27.184,1.344 ; 26.286,1.36 27.2,1.36 ; 26.286,1.377 27.217,1.377 ; 26.286,1.393 27.233,1.393 ; 26.286,1.41 27.25,1.41 ; 26.303,1.426 27.266,1.426 ; 26.303,1.443 27.283,1.443 ; 26.303,1.459 27.299,1.459 ; 26.303,1.476 27.316,1.476 ; 26.303,1.492 27.332,1.492 ; 26.319,1.509 27.349,1.509 ; 26.319,1.525 27.365,1.525 ; 26.319,1.542 27.365,1.542 ; 26.319,1.558 27.382,1.558 ; 26.336,1.575 27.398,1.575 ; 26.336,1.591 27.415,1.591 ; 26.336,1.608 27.431,1.608 ; 26.336,1.624 27.448,1.624 ; 26.336,1.641 27.464,1.641 ; 26.352,1.657 27.481,1.657 ; 26.352,1.674 27.497,1.674 ; 26.352,1.69 27.514,1.69 ; 26.352,1.707 27.53,1.707 ; 26.352,1.723 27.547,1.723 ; 26.369,1.74 27.547,1.74 ; 26.369,1.756 27.563,1.756 ; 26.369,1.773 27.58,1.773 ; 26.369,1.789 27.596,1.789 ; 26.386,1.806 27.613,1.806 ; 26.386,1.822 27.629,1.822 ; 26.386,1.839 27.646,1.839 ; 26.386,1.855 27.662,1.855 ; 26.386,1.872 27.679,1.872 ; 26.402,1.888 27.695,1.888 ; 26.402,1.905 27.712,1.905 ; 26.402,1.922 27.728,1.922 ; 26.402,1.938 27.728,1.938 ; 26.402,1.955 27.745,1.955 ; 26.419,1.971 27.761,1.971 ; 26.419,1.988 27.778,1.988 ; 26.419,2.004 27.794,2.004 ; 26.419,2.021 27.811,2.021 ; 26.435,2.037 27.827,2.037 ; 26.435,2.054 27.844,2.054 ; 26.435,2.07 27.86,2.07 ; 26.435,2.087 27.877,2.087 ; 26.435,2.103 27.893,2.103 ; 26.452,2.12 27.893,2.12 ; 26.452,2.136 27.91,2.136 ; 26.452,2.153 27.926,2.153 ; 26.452,2.169 27.943,2.169 ; 26.452,2.186 27.959,2.186 ; 26.468,2.202 27.976,2.202 ; 26.468,2.219 27.992,2.219 ; 26.468,2.235 28.009,2.235